# Altium PCB ATMEGA16.PcbDoc
Units mm, origin at the board's own origin, x right, y up, seen from the top; angles counter-clockwise.
Board outline 40 x 40 mm, 4 copper layers (Top Layer, Internal Plane 1, Internal Plane 2, Bottom Layer), stack 0.462 mm thick; 19 components, 43 nets, 148 pads, 0 vias.
Unrouted connection lines stored in the file: 104.
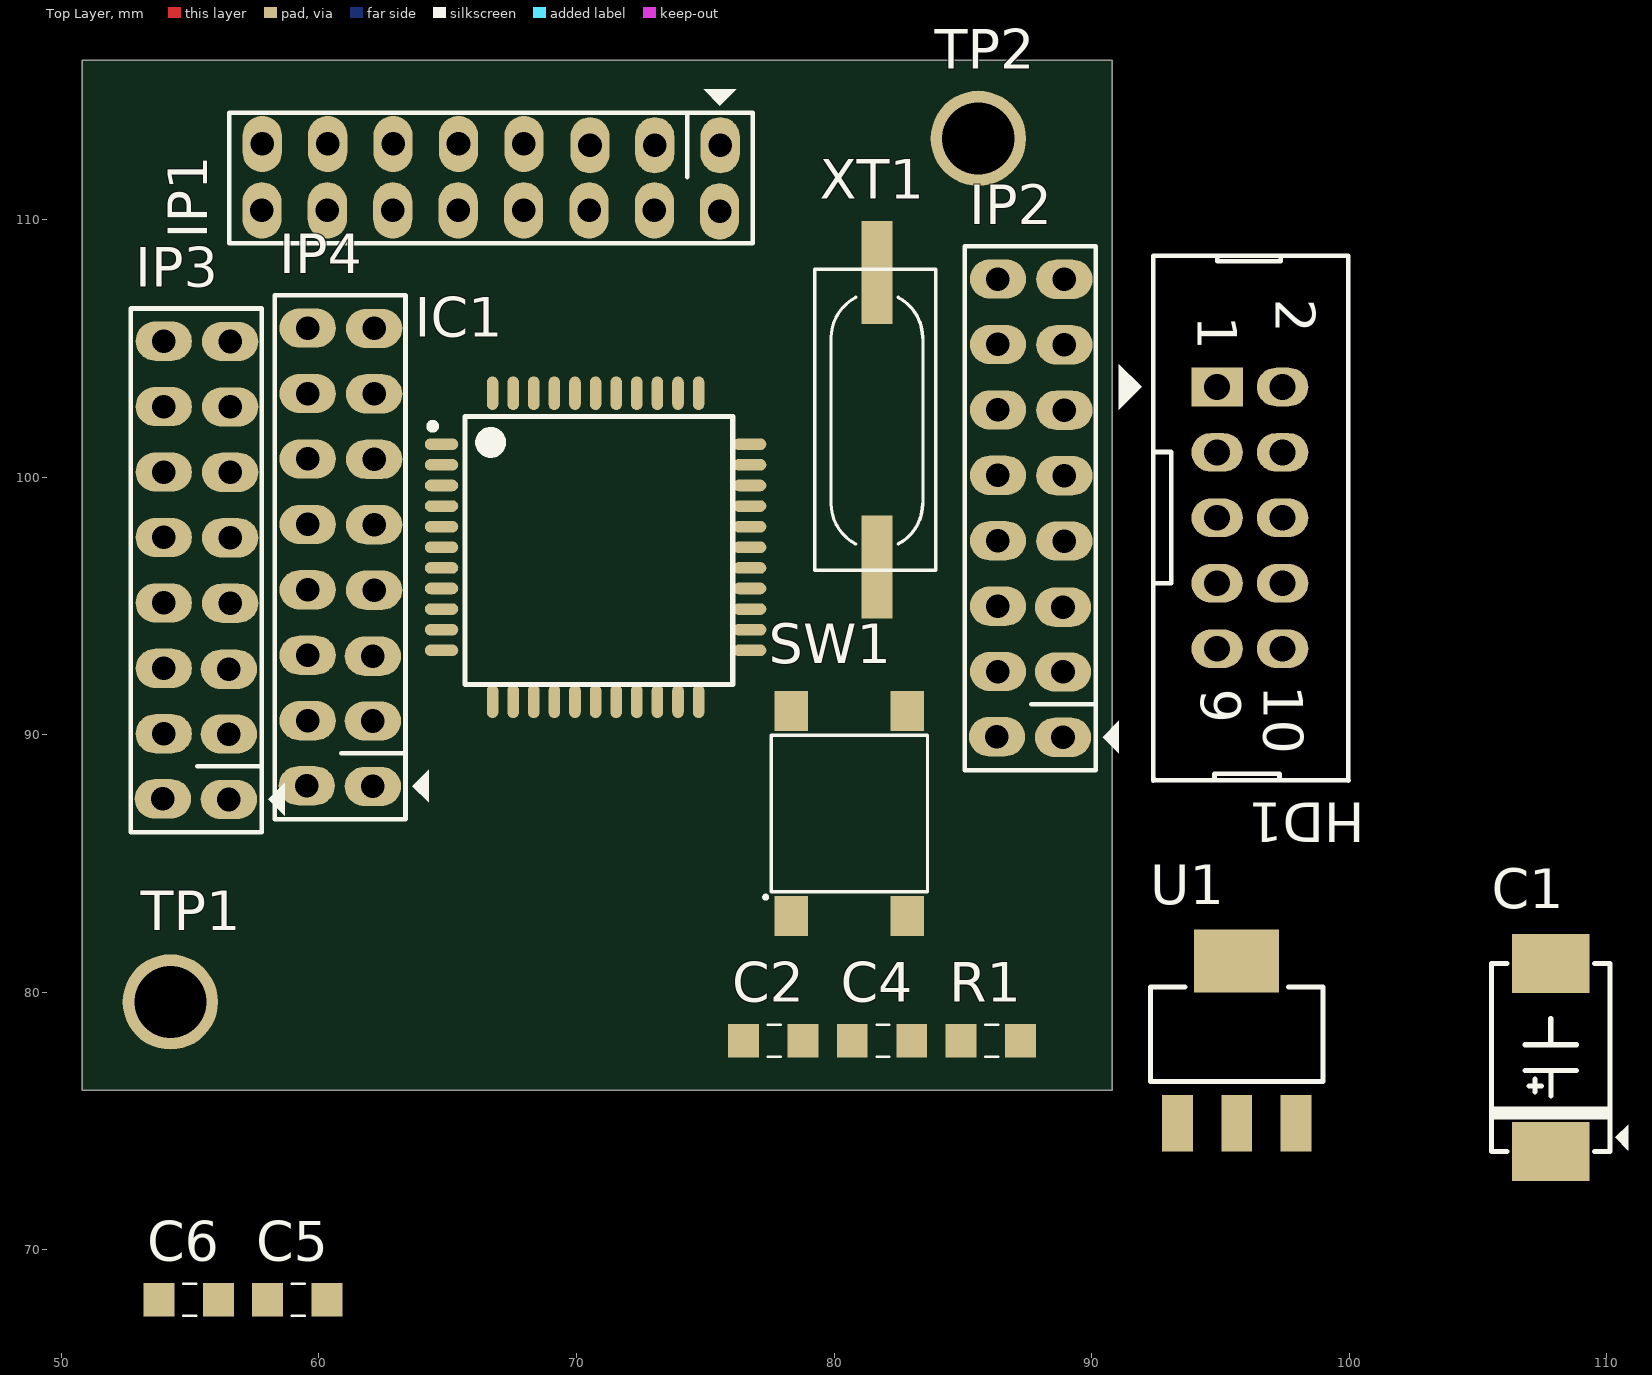
[diagram p0: Top Layer view]
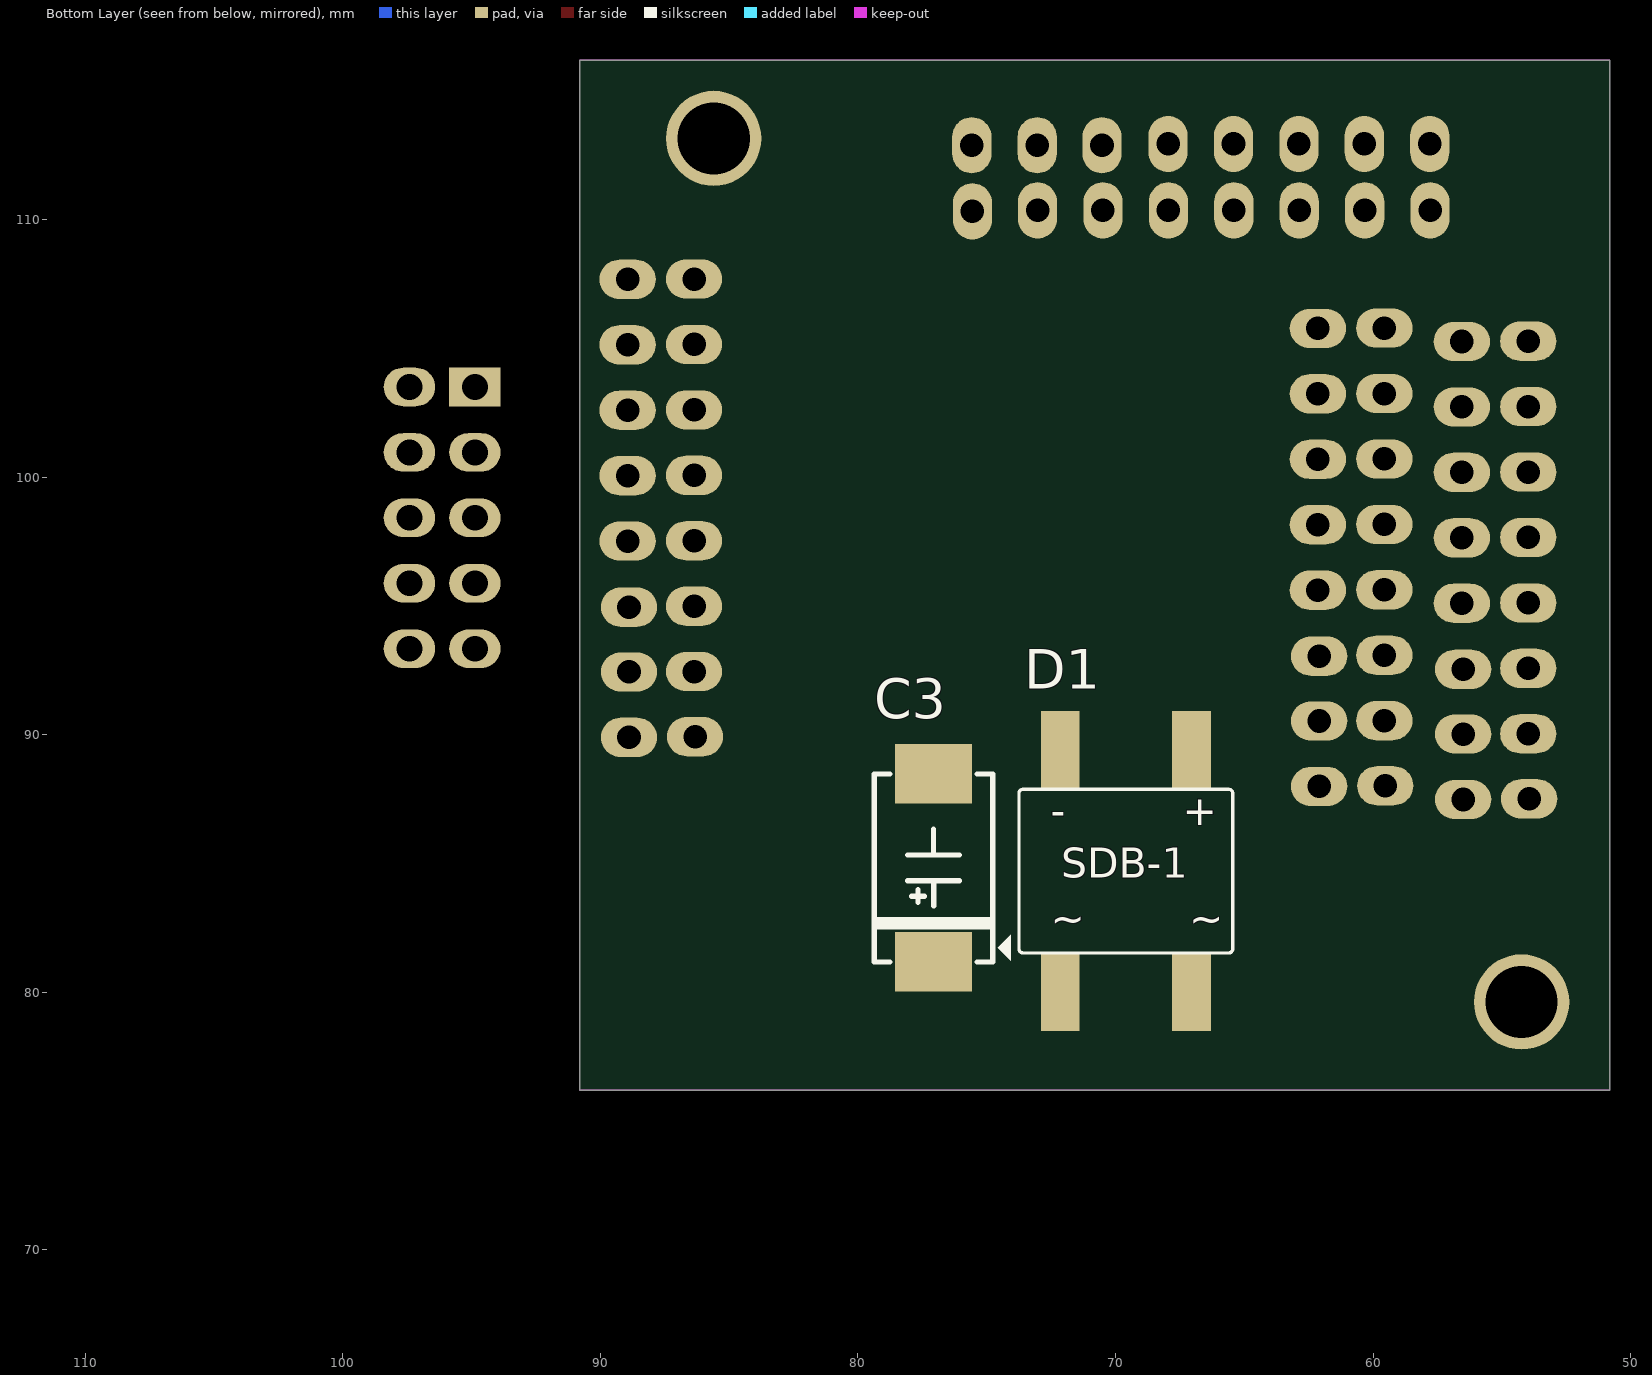
[diagram p1: Bottom Layer view, seen from below]
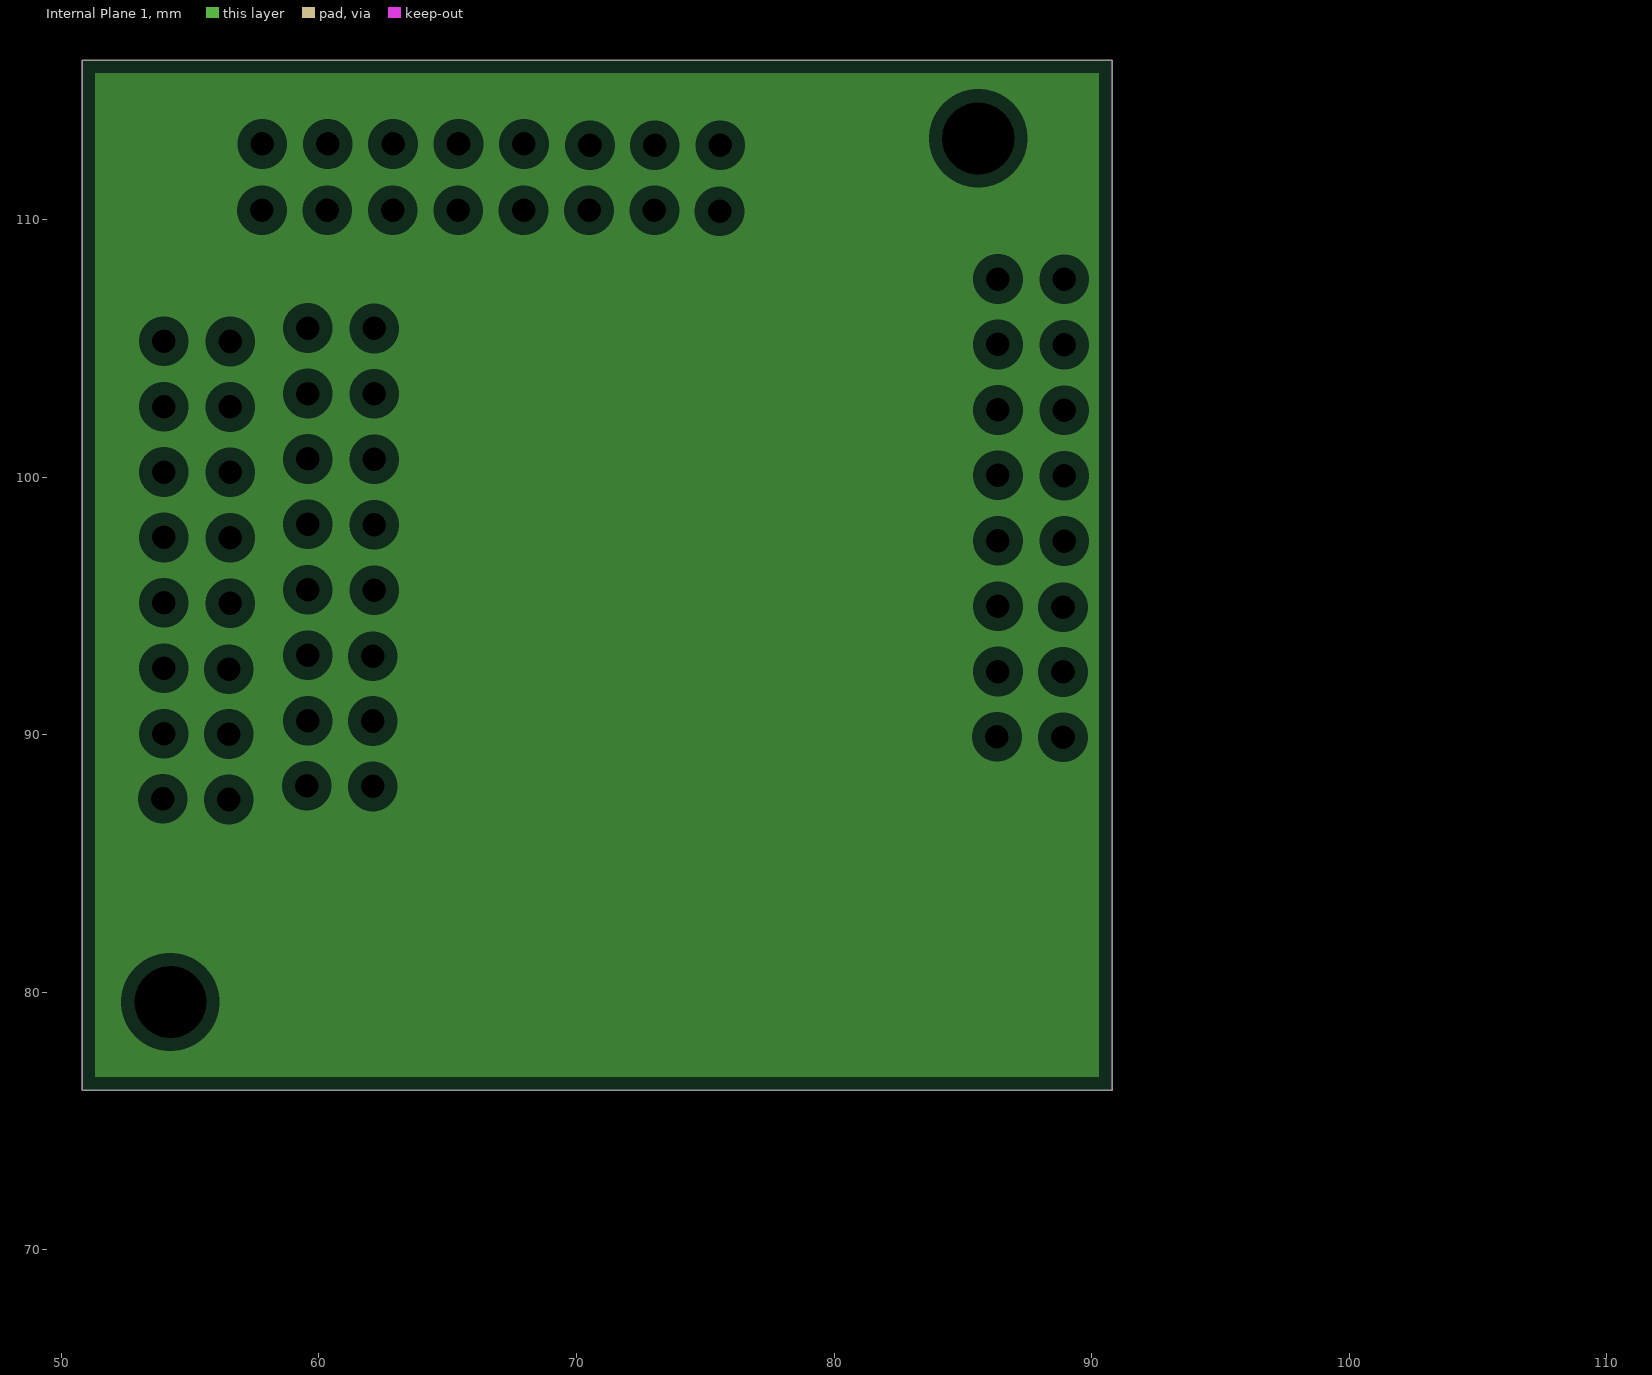
[diagram p2: Internal Plane 1, clearances drawn from the general rule]
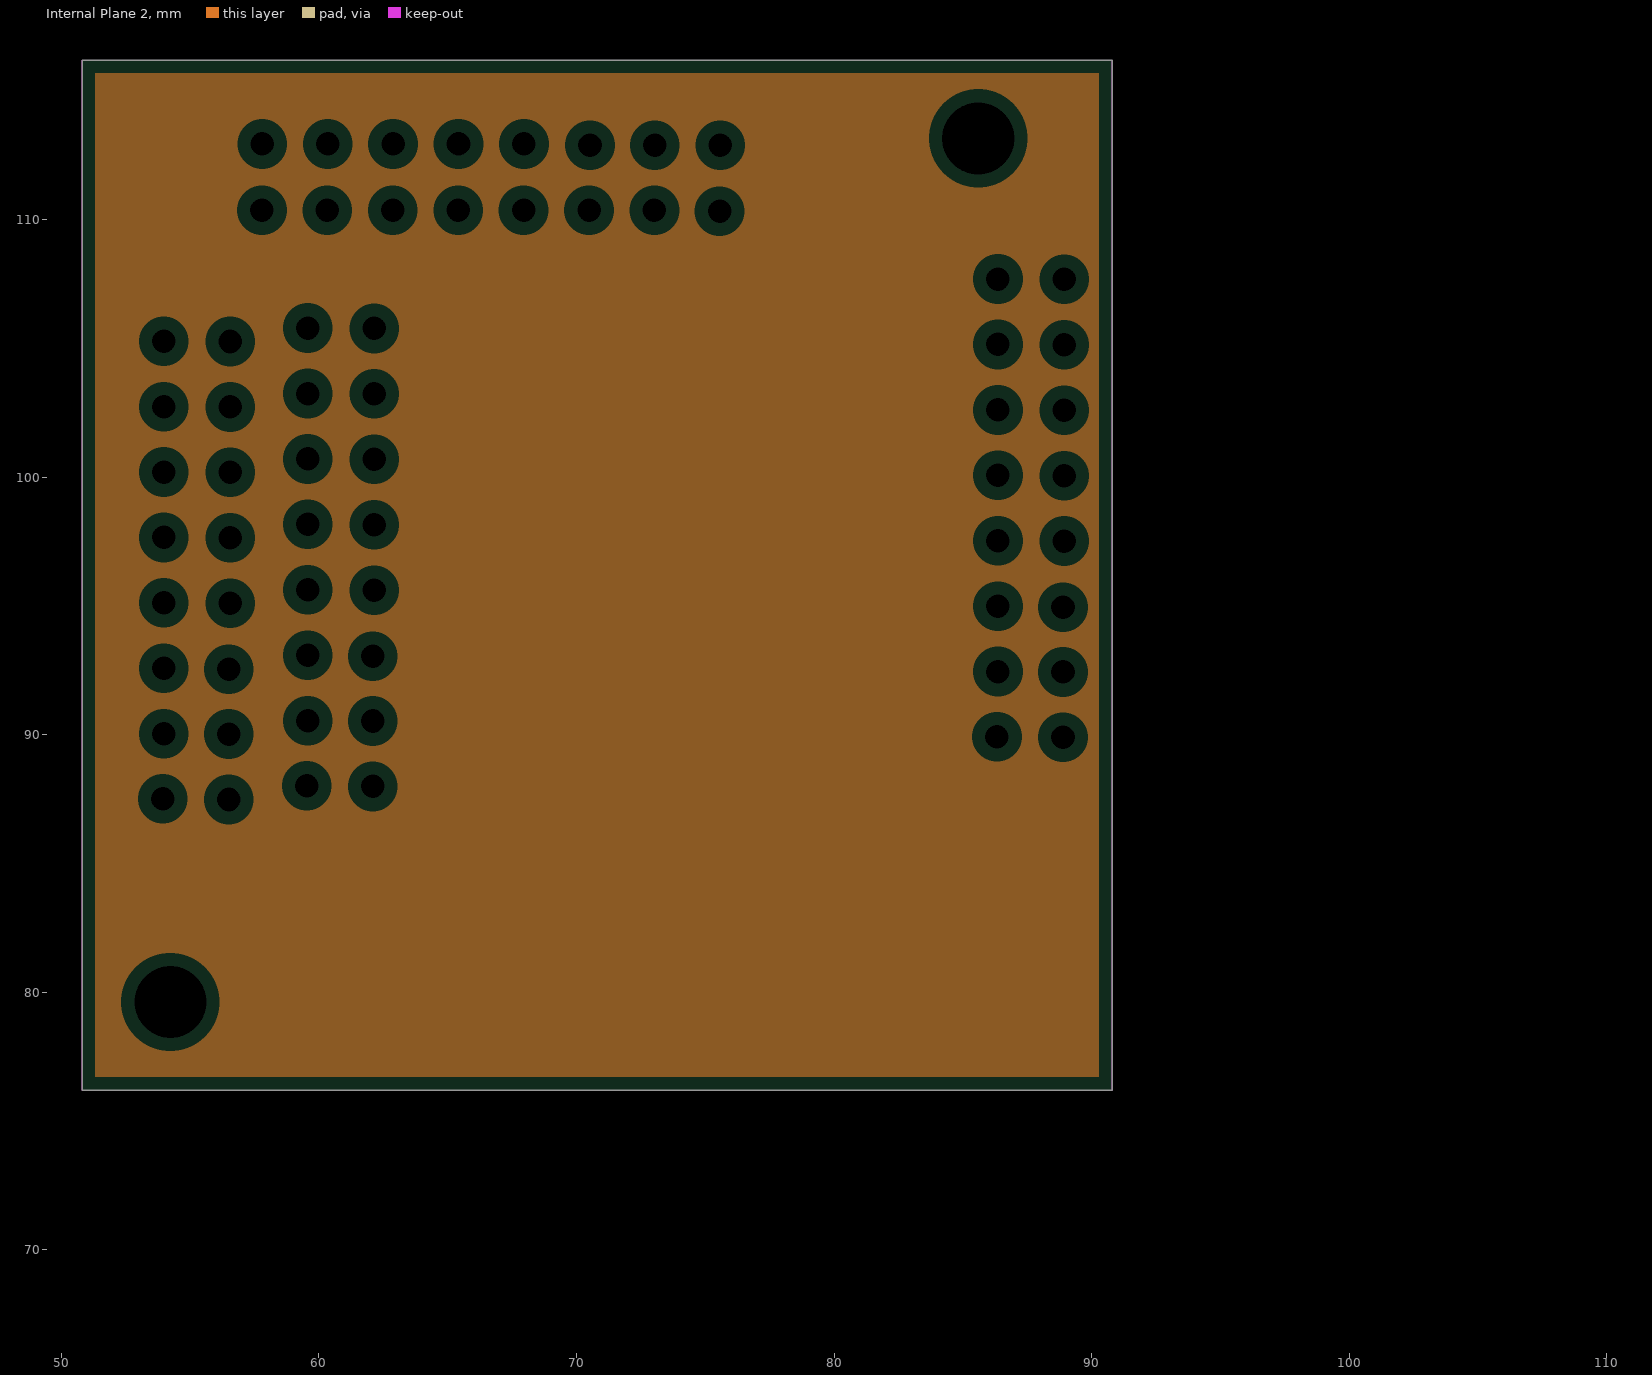
[diagram p3: Internal Plane 2, clearances drawn from the general rule]

## Layer stack, top to bottom
Top Solder: solder mask 0.0102, Solder Resist, Dk 3.5
Top Layer: signal copper 0.0356
Internal Plane 1: plane copper 0.0356
Internal Plane 2: plane copper 0.0356
Dielectric 1: dielectric 0.32, FR-4, Dk 4.8
Bottom Layer: signal copper 0.0356
Bottom Solder: solder mask 0.0102, Solder Resist, Dk 3.5

## Board outline
50.8,76.2 90.8,76.2 90.8,116.2 50.8,116.2

## Design rules (kind name [scope] priority, off if disabled: settings)
Clearance [All] p1: gap=0.2
PlaneClearance [All] p1: clearance=0.508
PlaneConnect [All] p1: planeconnectstyle=Relief reliefexpansion=0.508 reliefentries=4 reliefconductorwidth=0.254 reliefairgap=0.254
PolygonConnect [All] p1: connectstyle=Relief reliefconductorwidth=0.254 reliefentries=4 polygonreliefangle="90 Angle" airgapwidth=0.254
RoutingVias [All] p1: holewidth=0.6 width=1 viastyle="Through Hole" minholewidth=0.711 minwidth=1.27 maxholewidth=0.711 maxwidth=1.27
SolderMaskExpansion [All] p1: expansion=0.102
Width [All] p1: maxlimit=0.2 minlimit=0.2 preferedwidth=0.2
28 further rules are at their usual default settings.

## Components (designator, comment, footprint, x,y, rotation, side; value= is the part's Value field where it differs from the comment)
C1 "470uF/16V" C-TANT-7343 107.823,77.47 r90 top
C2 "100nF" CER-0805 77.602,78.122 r0 top
C3 "470uF/16V" C-TANT-7343 77.064,84.836 r90 bottom
C4 "100nF" CER-0805 81.822,78.122 r0 top
C5 "22pF" CER-0805 59.124,68.064 r0 top
C6 "22pF" CER-0805 54.904,68.064 r0 top
D1 "DB 1A" D-DB-1A-SMD 69.596,84.709 r180 bottom
HD1 "Header 5x2" Hed2X5 94.869,103.505 r270 top
IC1 "ATMEL 16A" TQFP44 70.739,97.282 r0 top
IP1 "JP8X2" JP8X2 75.565,112.903 r180 top
IP2 "JP8X2" JP8X2 88.9,89.916 r90 top
IP3 "JP8X2" JP8X2 56.515,87.503 r90 top
IP4 "JP8X2" JP8X2 62.103,88.011 r90 top
R1 "10K" RES-0805 86.118,78.122 r0 top
SW1 "SW" SW2-SMD 80.593,86.948 r90 top
TP1 "TP" TP 54.229,79.629 r0 top
TP2 "TP" TP 85.598,113.157 r0 top
U1 "AMS1117-5V" LM1117 95.631,78.359 r0 top
XT1 "20Mhz" XTAL-RU49/4 81.661,97.282 r90 top

## Footprints (in the part's own frame and the unit in brackets; to place one, negate y for a bottom-side part, rotate by r counter-clockwise, add the part's x,y. Pads: shape width x height; smd on the part's side, far side on the other; paste and mask are expansions set on the pad)
C-TANT-7343 [mm] "Tantalium Capacitor 7343-31"
  rect 2.3x3 smd: 1(-3.65,0) 2(3.65,0)
  silkscreen extent -3.65,-3 3.65,2.3, body extent -3.79,-2.3 3.81,2.3, height 3.1
CER-0805 [mm]
  rect 1.2x1.3 smd: 1(-1.116,0) 2(1.192,0)
  silkscreen extent -0.17,-0.63 0.33,0.63, body extent -0.97,-0.65 1.03,0.6, height 0.8
D-DB-1A-SMD [mm] "DB106S"
  rect 1.5x3 smd: 1(-2.55,-4.713) 2(2.55,-4.713) 3(2.55,4.713) 4(-2.55,4.713)
  silkscreen extent -4.15,-3.18 4.15,3.18, body extent -4.15,-4.95 4.15,4.95, height 3.35
Hed2X5 [mm] "Header 10x2,20 pin, connecter"
  rect 1.5x2 hole 1: 1(0,0)
  oval 1.5x2 hole 1: 2(0,2.54) 3(2.54,0) 4(2.54,2.54) 5(5.08,0) 6(5.08,2.54) 7(7.62,0) 8(7.62,2.54) 9(10.16,0) 10(10.16,2.54)
  silkscreen extent -5.1,-3.81 15.29,5.11, body extent -5.17,-3.33 15.33,5.97, height 8.82
JP8X2 [mil]
  oval 60x86 hole 36: 1(-0.5,0.5) 2(99.5,0.5) 3(198.5,0.5) 4(299.5,-1.5) 5(399.5,-1.5) 6(499.5,-1.5) 7(599.5,-1.5) 8(699.5,-1.5) 9(0.5,101.5) 10(100,100) 11(200,100) 12(300,100) 13(400,100) 14(500,100) 15(600,100) 16(700,100)
  silkscreen extent -51,-85 750,151, body extent -50,-50 750,150, height 335
LM1117 [mm] "SOT223, 4-Leads, Body 6.7x10.0mm (max), Pitch 2.30mm, IPC Low Density"
  rect 1.2x2.2 smd: 1(-2.3,-3.445) 2(0,-3.445) 3(2.3,-3.445)
  rect 3.3x2.45 smd: 4(0,2.855)
  silkscreen extent -3.35,-1.82 3.35,1.85, body extent -3.25,-3.44 3.25,3.45, height 1.71
RES-0805 [mm]
  rect 1.2x1.3 smd: 1(-1.192,0) 2(1.116,0)
  silkscreen extent -0.25,-0.63 0.25,0.63, body extent -1.05,-0.62 0.95,0.63, height 0.5
SW2-SMD [mm] "6*6mm vertical type, SMD, height 5.0mm, black actuator, 160gf, T&R"
  rect 1.55x1.3 smd: 1(-3.975,2.25) 2(-3.975,-2.25) 3(3.975,-2.25) 4(3.975,2.25)
  silkscreen extent -3.29,-3.04 3.04,3.29, body extent -4.5,-3.1 4.5,3.1, height 4.99
TP [mm]
  round 3.7 hole 2.8: 1(0,0)
TQFP44 [mm] "TQFP, 44-Leads, Body 10X10mm, Pitch 0.80mm, IPC High Density"
  oval 1.3x0.45 smd: 1(-5.981,4) 2(-5.981,3.2) 3(-5.981,2.4) 4(-5.981,1.6) 5(-5.981,0.8) 6(-5.981,0) 7(-5.981,-0.8) 8(-5.981,-1.6) 9(-5.981,-2.4) 10(-5.981,-3.2) 11(-5.981,-4) 23(5.981,-4) 24(5.981,-3.2) 25(5.981,-2.4) 26(5.981,-1.6) 27(5.981,-0.8) 28(5.981,0) 29(5.981,0.8) 30(5.981,1.6) 31(5.981,2.4) 32(5.981,3.2) 33(5.981,4)
  oval 0.45x1.3 smd: 12(-4,-5.981) 13(-3.2,-5.981) 14(-2.4,-5.981) 15(-1.6,-5.981) 16(-0.8,-5.981) 17(0,-5.981) 18(0.8,-5.981) 19(1.6,-5.981) 20(2.4,-5.981) 21(3.2,-5.981) 22(4,-5.981) 34(4,5.981) 35(3.2,5.981) 36(2.4,5.981) 37(1.6,5.981) 38(0.8,5.981) 39(0,5.981) 40(-0.8,5.981) 41(-1.6,5.981) 42(-2.4,5.981) 43(-3.2,5.981) 44(-4,5.981)
  silkscreen extent -6.45,-5.33 5.33,5.07, body extent -5.99,-5.96 6.01,6.04, height 1.05
XTAL-RU49/4 [mm]
  rect 4x1.2 smd: 1(-0.762,0) 2(10.668,0)
  silkscreen extent -0.89,-2.29 10.8,2.41, body extent -1.2,-2.22 11.1,2.48, height 4.3

## Part data
C1 C3: library part Capacitor
C2 C4 C5 C6: library part Ceramic
D1: library part DB
HD1: library part HED5x2_S
IC1: library part ATmega16A-AU, "8-bit AVR Microcontroller, 16KB Flash, 512 Bytes EEPROM, 1KB SRAM, 44-pin TQFP, Industrial Grade (-40°C to 85°C)"
R1: library part Res1/4W
SW1: library part SW4, "Switch button 4 pin"
U1: library part LM1117IMP-3.3, "800mA Low-Dropout Linear Regulator"
XT1: library part XT2, "Crystal, 32.768 KHz, -40 to 85 degC, 3.2 x 1.5 x 0.9 mm SMD"

## Nets (pads, with @x,y where several pads share a name; then routed paths per layer and width w, separated by ;. In a path a pad name is that pad's centre, name@x,y a point inside that pad or via, vN(x,y) a via of type N, cw(c..) or ccw(c..) an arc to the next point about the centre after c; other vN are vias at no path point)
+5V: C3.1 C4.2 HD1.2 IC1.5 IC1.17 IC1.27 IC1.29 IC1.38 R1.2 U1.2
+12V: C1.1 C2.2 D1.4 U1.3
A0: IC1.37 IP1.1 IP1.16
A1: IC1.36 IP1.2 IP1.15
A2: IC1.35 IP1.3 IP1.14
A3: IC1.34 IP1.4 IP1.13
A4: IC1.33 IP1.5 IP1.12
A5: IC1.32 IP1.6 IP1.11
A6: IC1.31 IP1.7 IP1.10
A7: IC1.30 IP1.8 IP1.9
AC1: D1.1 TP1.1
AC2: D1.2 TP2.1
B0: IC1.40 IP3.1 IP3.16
B1: IC1.41 IP3.2 IP3.15
B2: IC1.42 IP3.3 IP3.14
B3: IC1.43 IP3.4 IP3.13
B4: IC1.44 IP3.5 IP3.12
B5: IC1.1 IP3.6 IP3.11
B6: IC1.2 IP3.7 IP3.10
B7: IC1.3 IP3.8 IP3.9
C0: IC1.19 IP2.1 IP2.16
C1: IC1.20 IP2.2 IP2.15
C2: IC1.21 IP2.3 IP2.14
C3: IC1.22 IP2.4 IP2.13
C4: IC1.23 IP2.5 IP2.12
C5: IC1.24 IP2.6 IP2.11
C6: IC1.25 IP2.7 IP2.10
C7: IC1.26 IP2.8 IP2.9
D0: IC1.9 IP4.1 IP4.16
D1: IC1.10 IP4.2 IP4.15
D2: IC1.11 IP4.3 IP4.14
D3: IC1.12 IP4.4 IP4.13
D4: IC1.13 IP4.5 IP4.12
D5: IC1.14 IP4.6 IP4.11
D6: IC1.15 IP4.7 IP4.10
D7: IC1.16 IP4.8 IP4.9
GND: C1.2 C2.1 C3.2 C4.1 C5.1 C6.1 D1.3 HD1.4 HD1.6 HD1.8 HD1.10 IC1.6 IC1.18 IC1.28 IC1.39 SW1.1 SW1.4 U1.1 U1.4
MISO: HD1.9
MOSI: HD1.1
RST: HD1.5 IC1.4 R1.1 SW1.2 SW1.3
SCK: HD1.7
XT1: C5.2 IC1.8 XT1.2
XT2: C6.2 IC1.7 XT1.1
pads on no net: HD1.3

## Keep-outs
Keep-Out Layer:
  the board outline again, w0

## Dimensions
50.8,76.2 to 50.8,116.2 on Mechanical 1
50.8,76.2 to 90.8,76.2 on Mechanical 1

## Text inside footprints (layer, text, board x,y; h text height)
D1: Bottom Overlay "SDB-1" at 72.104,84.069 h2; Bottom Overlay "-         +" at 72.517,86.106 h2; Bottom Overlay "~        ~" at 72.517,81.915 h2
HD1: Top Overlay "1" at 94.119,106.28 h1.52 r270; Top Overlay "2" at 97.155,106.934 h1.52 r270; Top Overlay "9" at 94.259,91.796 h1.52 r270; Top Overlay "10" at 96.672,91.923 h1.52 r270